# Altium PCB Final_PDC.PcbDoc (part 3 of 4)
Units mil, origin at the board's own origin, x right, y up, seen from the top; angles counter-clockwise.
Board outline 5200.04 x 5000 mil, 4 copper layers (Top Layer, Signal Layer 1, Signal Layer 2, Bottom Layer), stack 30.634 mil thick; 172 components, 174 nets, 838 pads, 925 vias.
Unrouted connection lines stored in the file: 134.
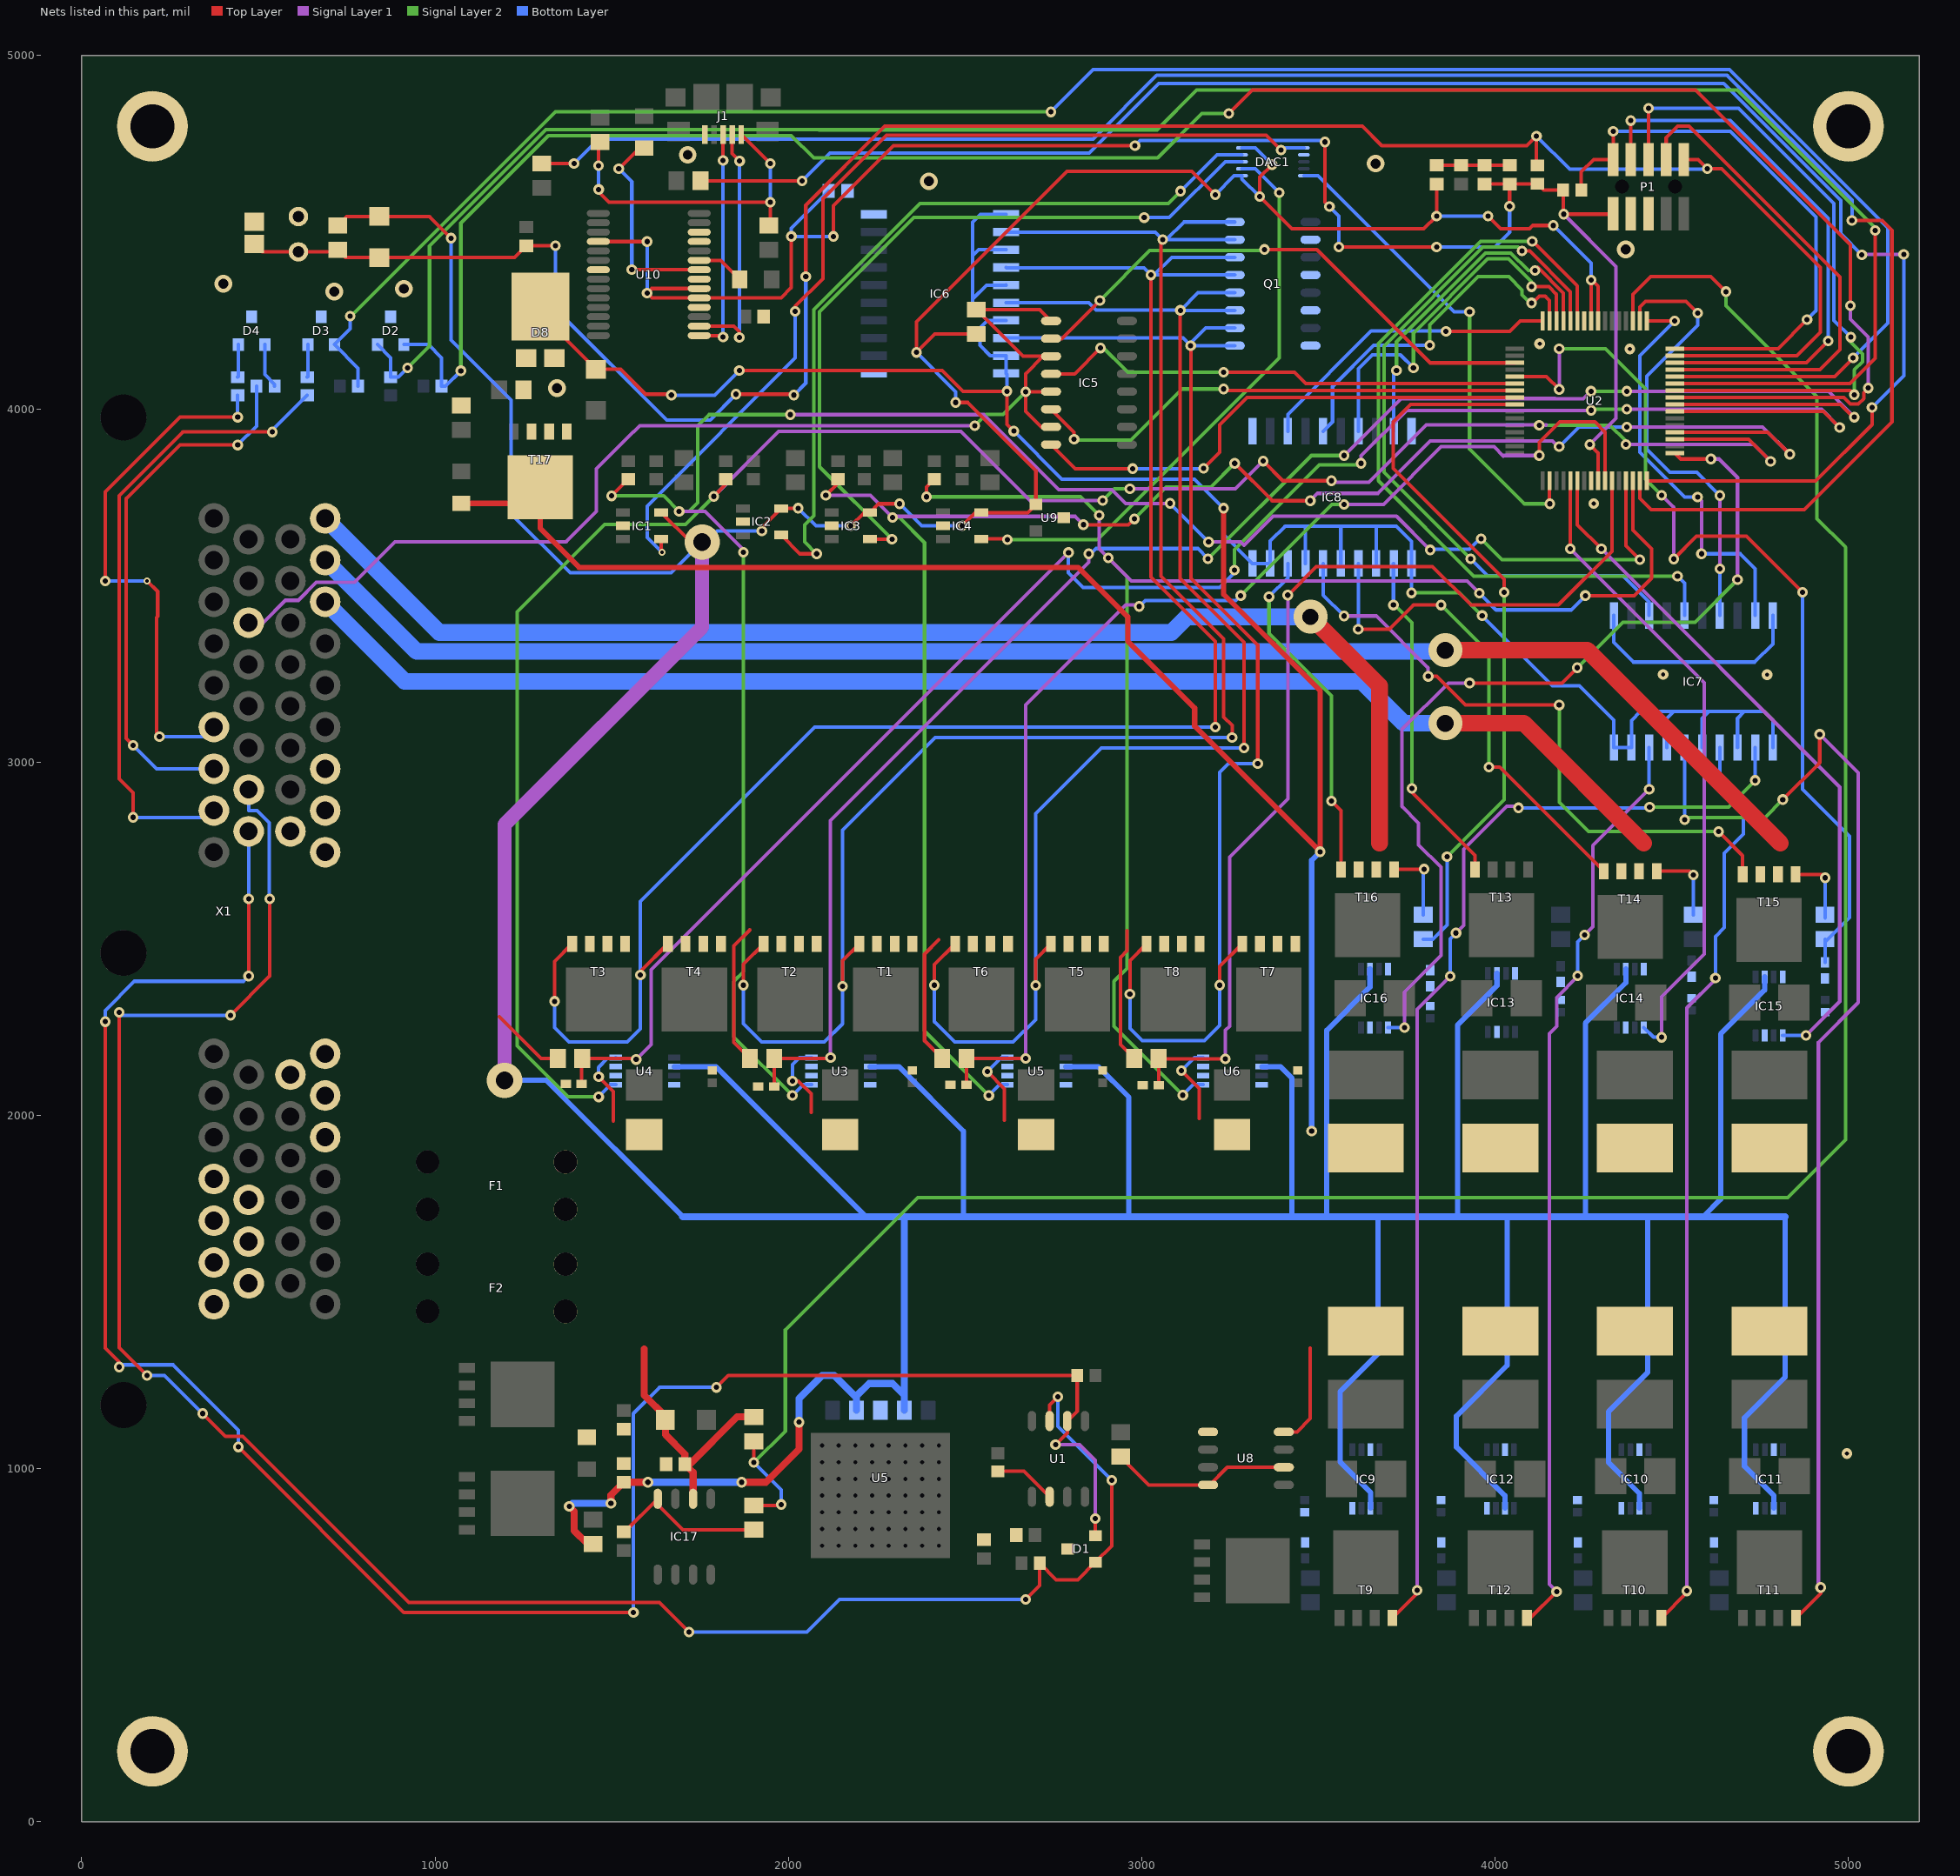
[diagram p4: the nets of this part, all layers, seen from the top]

## Via types
v1: diameter 24, hole 11, Top Layer to Bottom Layer, 480 vias
v2: diameter 30, hole 15, Top Layer to Bottom Layer, 416 vias
v3: diameter 50, hole 28, Top Layer to Bottom Layer, 9 vias
v4: diameter 30, hole 12, Top Layer to Bottom Layer, 6 vias
v5: diameter 96, hole 48, Top Layer to Bottom Layer, 6 vias
v6: diameter 100, hole 50, Top Layer to Bottom Layer, 4 vias
v7: diameter 20, hole 10, Top Layer to Bottom Layer, 2 vias
v8: diameter 96, hole 46, Top Layer to Bottom Layer, 1 vias
v9: diameter 40, hole 20, Top Layer to Bottom Layer, 1 vias

## Nets (pads, with @x,y where several pads share a name; then routed paths per layer and width w, separated by ;. In a path a pad name is that pad's centre, name@x,y a point inside that pad or via, vN(x,y) a via of type N, cw(c..) or ccw(c..) an arc to the next point about the centre after c; other vN are vias at no path point) (continued)
+5: C4.2 C19.2 D6.2 DAC1.1 DAC1.5 IC1.5 IC2.5 IC3.5 IC4.5 IC9.2 IC10.2 IC11.2 IC12.2 IC13.2 IC14.2 IC15.2 IC16.2 R16.2 R63.1 R65.2 U2.8 U2.9 U3.2 U4.2 U5.2 U5.4@2328.09,1164.95 U6.2 U9.1 | length 23352.1
  Top Layer w10: R65.2@724.37,4518.87 749.97,4544.46 D6.2@842.48,4544.46 984.3,4544.46 v2(1045.52,4483.24) ; IC1.5@1640.36,3706.47 1723.72,3623.1 v6(1755.74,3623.1) ; v2(1924.89,3654.59) 1924.89,3663.73 IC2.5@1979.25,3718.1 2027.16,3718.1 v2(2027.9,3718.84) ; v2(2176.77,3669.07) 2214.17,3706.47 IC3.5@2230.91,3706.47 2255.78,3731.34 v2(2314.57,3731.34) ; v2@2469.53,4018.06 v2(2473.57,4018.06) 2507.5,4018.06 2700.31,3825.25 U9.1@2700.31,3729.4 2677.38,3706.47 IC4.5@2545.87,3706.47 2529.13,3706.47 v2(2491.73,3669.07) ; R16.2@2532.01,4211.98 2414.37,4211.98 v2(2362.2,4159.81) 2362.2,4246.43 2788.51,4672.73 3141.4,4672.73 v2(3207.82,4606.3) ; v2(3368.8,4691.38) 3333.47,4656.04 v2(3333.47,4600.88) 3424.94,4509.41 3797.71,4509.41 v2(3834.26,4545.96) C4.2@3834.26,4636.53 ; v2(3979.76,4545.96) 4015.85,4509.86 4097.48,4509.86 4106.8,4519.18 v2(4164.97,4519.18) ; U2.9@4272.05,4248.99 v2(4272.05,4364.65) 4273.9,4364.65 4291.73,4346.82 U2.8@4291.73,4248.99
  Top Layer w20: v2(1379.63,893.21) 1393.64,879.2 1393.64,824.52 1431.36,786.8 R63.1@1446.99,786.8 ; v2(1497.74,901.96) 1497.74,925.34 C19.2@1534,961.61 v2(1602.33,961.61) ; v2(1867.8,961.61) 1936.27,961.61 2029.86,1055.2 v2(2029.86,1131.68)
  Signal Layer 1 w40: v6(1196.81,2099.3) 1196.81,2823.46 1755.74,3382.39 v6(1755.74,3623.1)
  Bottom Layer w10: v2(1045.52,4483.24) 1045.52,4194.53 1215.36,4024.69 1215.36,3702.64 1382.27,3535.73 1668.38,3535.73 v6(1755.74,3623.1) 1766.94,3623.1 1798.44,3654.59 v2(1924.89,3654.59) ; v2(2027.9,3718.84) 2077.67,3669.07 v2(2176.77,3669.07) ; 2192.65,1201.31 2192.65,1205.61 ; v2(2314.57,3731.34) 2376.85,3669.07 v2(2491.73,3669.07) ; v2(2362.2,4159.81) 2473.57,4048.45 v2(2473.57,4018.06) ; v2(3207.82,4606.3) 3261.54,4660.02 DAC1.1@3283.58,4660.02 3283.58,4650.76 v2(3333.47,4600.88) ; DAC1.5@3283.58,4738.76 3321.42,4738.76 v2(3368.8,4691.38) ; v2(3834.26,4545.96) v2(3979.76,4545.96) ; v2(4164.97,4519.18) 4272.05,4412.11 v2(4272.05,4364.65)
  Bottom Layer w15: v6(1196.81,2099.3) 1314.92,2099.3 1700.89,1713.32 ; U4.2@1677,2138.09 1794.76,2138.09 2219.52,1713.32 ; U3.2@2231.12,2138.09 2312.72,2138.09 2495.39,1955.43 2495.39,1713.32 ; U5.2@2785.25,2138.09 2876.82,2138.09 2963.14,2051.77 2963.14,1714.09 2962.38,1713.32 ; U6.2@3339.37,2138.09 3392.26,2138.09 3425.2,2105.15 3425.2,1713.32 ; 3523.53,1713.32 3523.53,2241.03 3645.85,2363.35 IC16.2@3645.85,2414.29 ; IC9.2@3647.23,887.88 3647.23,932.97 3561.6,1018.6 3561.6,1218.3 3668.96,1325.67 3668.96,1713.32 ; 3893.31,1713.32 3894.02,1714.03 3894.02,2256.17 4005.24,2367.39 IC13.2@4005.24,2402.09 ; IC12.2@4027.81,887.88 4027.81,923.85 3890.34,1061.32 3890.34,1148.59 4033.86,1292.1 4033.86,1713.32 ; 4255.27,1713.32 4255.27,2260.96 4369.67,2375.36 IC14.2@4369.67,2414.29 ; IC10.2@4408.39,887.88 4408.39,930.01 4320.59,1017.8 4320.59,1161.29 4431.25,1271.95 4431.25,1713.32 ; 4589.28,1713.32 4638.37,1762.42 4638.37,2230.61 4762.78,2355.02 IC15.2@4762.78,2392.24 ; IC11.2@4788.96,887.88 4788.96,923.52 4705.7,1006.79 4705.7,1144.03 4820.74,1259.07 4820.74,1713.32
  Bottom Layer w20: v2(1379.63,893.21) 1388.38,901.96 v2(1497.74,901.96) ; v2(1602.33,961.61) v2(1867.8,961.61) ; 1700.89,1713.32 2219.52,1713.32 2328.09,1713.32 ; v2(2029.86,1131.68) 2029.86,1198.69 2095.07,1263.9 2130.06,1263.9 2192.65,1201.31 U5.2@2192.65,1164.95 ; 2192.65,1205.61 2228.09,1241.05 2294.83,1241.05 2328.09,1207.79 ; U5.4@2328.09,1164.95 2328.09,1207.79 ; 4820.74,1713.32 4589.28,1713.32 4431.25,1713.32 4255.27,1713.32 4033.86,1713.32 3893.31,1713.32 3668.96,1713.32 3523.53,1713.32 3425.2,1713.32 2962.38,1713.32 2495.39,1713.32 2328.09,1713.32 ; 2328.09,1207.79 2328.09,1713.32
+12: "PTC Fuse1.2" "PTC Fuse2.2" "PTC Fuse3.2" "PTC Fuse4.2" "PTC Fuse5.2" "PTC Fuse6.2" "PTC Fuse7.2" "PTC Fuse8.2" C21.2 D5.1 D7.2 D8.3 F1.1 F2.1 IC6.11 IC6.13 IC6.15 IC6.17 IC6.19 IC6.20 IC7.11 IC7.13 IC7.15 IC7.17 IC7.19 IC7.20 IC8.11 IC8.13 IC8.15 IC8.17 IC8.19 IC8.20 IC17.2 LED2.1 R25.2 R28.2 R31.2 R34.2 R61.2 R64.1 T17.mb U3.8 U4.8 U5.8 U6.8 U8.4 U8.6 U8.8 | length 13545.8
  Top Layer w10: D8.3@1297.84,4289.53 1297.84,4269.49 D7.2@1455.32,4112.01 1525.11,4112.01 1595.62,4041.5 1666.34,4041.5 v2(1668.9,4038.94) ; v2(1463.06,2109.53) 1504.47,2068.12 1504.47,1984.55 ; v2(1861,4108.9) 2435.17,4108.9 2494.14,4049.92 v2(2618.44,4049.92) 2618.44,3956.36 v2(2637.8,3937.01) ; v2(2011.16,2096.99) 2028.09,2096.99 2064.13,2060.94 2064.13,2008.42 ; v2(2562.82,2123.85) 2611.63,2075.04 2611.63,1986.28 ; R64.1@2940.29,1033.89 3020.21,953.97 U8.4@3187.34,953.97 3191.99,953.97 3241.99,1003.97 U8.6@3401.91,1003.97 ; v2(3111.82,2126.86) 3162.1,2076.58 3162.1,1991.04 ; U8.8@3401.91,1103.97 3439.37,1103.97 3476.81,1141.41 3476.81,1341.63
  Top Layer w15: LED2.1@1074.41,3732.44 1252.56,3732.44 T17.mb@1297.84,3777.72 1297.84,3661.35 1407.9,3551.28 2820.24,3551.28 2960.27,3411.25 2960.27,3342.45 3149.61,3153.11 3149.61,3101.84 v2(3505.13,2746.32) 3505.13,3201.65 3231.52,3475.26 v2(3231.52,3718.84)
  Top Layer w20: 1592.28,1339.29 1591.88,1207.9 1651.72,1148.07 D5.1@1651.72,1138.18 1651.72,1096.19 1706.84,1041.07 C21.2@1706.84,1013.18 C21.2@1708.7,1011.32 ; IC17.2@1730.26,914.75 1730.26,989.75 C21.2@1708.7,1011.32 ; R61.2@1902.11,1146.45 1854.58,1146.45 1719.45,1011.32 C21.2@1708.7,1011.32
  Signal Layer 2 w10: v2(3763.2,3479.15) 3898.92,3479.15 v2(3963.29,3414.77)
  Bottom Layer w10: v2(1463.06,2109.53) 1463.06,2134.99 1462.09,2135.96 1487.49,2161.36 1508.89,2161.36 U4.8@1511.21,2163.68 ; v2(1668.9,4038.94) 1791.04,4038.94 v2(1861,4108.9) ; v2(2011.16,2096.99) 2011.16,2143.42 2031.43,2163.68 U3.8@2065.33,2163.68 ; v2(2562.82,2123.85) 2602.65,2163.68 U5.8@2619.46,2163.68 ; IC6.17@2615.95,4250.43 2562.74,4250.43 ; IC6.15@2615.95,4350.43 2615.49,4349.97 2560.45,4349.97 2522.81,4312.33 2521.1,4312.33 ; IC6.13@2615.95,4450.43 2537.98,4450.43 2521.1,4433.56 ; IC6.11@2615.95,4550.43 2543.69,4550.43 2521.1,4527.84 2521.1,4433.56 ; v2(2618.44,4049.92) 2618.44,4097.94 IC6.20@2615.95,4100.43 IC6.19@2615.95,4150.43 2571.11,4150.43 2541.7,4179.84 2541.7,4229.39 2562.74,4250.43 ; v2(2637.8,3937.01) 2773.85,3800.96 3149.4,3800.96 v2(3231.52,3718.84) 3231.52,3644.18 IC8.20@3313.2,3562.5 IC8.19@3363.2,3562.5 3363.2,3625.75 3405.74,3668.3 3463.2,3668.3 ; v2(3111.82,2126.86) 3148.64,2163.68 U6.8@3173.58,2163.68 ; IC8.17@3463.2,3562.5 3463.2,3668.3 ; IC8.15@3563.2,3562.5 3563.2,3668.3 ; IC8.13@3663.2,3562.5 3663.2,3667.47 3664.02,3668.3 ; v2(3763.2,3479.15) IC8.11@3763.2,3562.5 3763.2,3625.11 3720.01,3668.3 3664.02,3668.3 ; v2(3963.29,3414.77) 4161.99,3216.07 4238.7,3216.07 4335.93,3118.85 IC7.20@4335.93,3041.34 IC7.19@4385.93,3041.34 4385.93,3117.9 4411.23,3143.2 4505.22,3143.2 ; IC7.17@4485.93,3041.34 4485.93,3123.92 4505.22,3143.2 ; IC7.15@4585.93,3041.34 4585.93,3123.92 4605.22,3143.2 ; IC7.13@4685.93,3041.34 4685.93,3123.92 4705.22,3143.2 ; IC7.11@4785.93,3041.34 4785.93,3119.35 4762.09,3143.2 4705.22,3143.2 ; 2521.1,4312.33 2521.1,4433.56 ; 2521.1,4312.33 2521.1,4292.07 2562.74,4250.43 ; 3463.2,3668.3 3563.2,3668.3 ; 3563.2,3668.3 3664.02,3668.3 ; 4505.22,3143.2 4605.22,3143.2 ; 4605.22,3143.2 4705.22,3143.2
  Bottom Layer w15: v2(3480.89,1955.43) 3480.89,2722.08 v2(3505.13,2746.32)
BAT_SENSE: R61.1 R62.2 U2.3 | length 6842.8
  Top Layer w10: R62.2@1902.11,895.86 1977.13,895.86 v2(1979.86,898.59) ; v2(1902.11,1017.43) R61.1@1902.11,1077.55 ; U2.3@4390.16,4248.99 4390.16,4323.56 4440.67,4374.07 4610.61,4374.07 4652.82,4331.85 v2(4653.01,4331.85)
  Signal Layer 2 w10: v2(1902.11,1017.43) 1991.33,1106.65 1991.33,1392.68 2365.68,1767.03 4828.12,1767.03 4991.64,1930.54 4991.64,3608.22 4911.01,3688.86 4911.01,4034.2 4653.01,4292.19 v2(4653.01,4331.85)
  Bottom Layer w10: v2(1902.11,1017.43) 1979.86,939.68 v2(1979.86,898.59)
CAN_N: D1.2 R13.1 U1.6 X1.A25 | length 6085.9
  Top Layer w10: v2(66.89,2265.37) 66.89,1340.86 106.26,1301.49 v2(106.26,1287.73) ; v2(443.39,1061.52) 911.68,593.23 v2(1561.56,593.23) ; v2(472.44,2394.49) v2(472.44,2613.19) ; v2(1796.24,1230.12) 1829.99,1263.86 R13.1@2817.34,1263.86 2817.34,1163.08 U1.6@2789.19,1134.93 2789.19,1101.62 v2(2755.91,1068.34) ; D1.2@2868.52,810.13 v2(2868.52,859.11)
  Signal Layer 1 w10: v2(2755.91,1068.34) 2824.04,1068.34 2868.52,1023.85 v2(2868.52,859.11)
  Bottom Layer w10: v2(66.89,2265.37) 66.89,2296.95 149.68,2379.73 457.69,2379.73 v2(472.44,2394.49) ; v2(106.26,1287.73) 112.43,1293.9 258.26,1293.9 443.39,1108.77 v2(443.39,1061.52) ; v2(472.44,2613.19) X1.A25@472.44,2804.18 ; v2(1561.56,593.23) 1561.56,1156.07 1635.6,1230.12 v2(1796.24,1230.12)
CAN_P: D1.1 R14.2 U1.7 X1.A24 | length 5873.4
  Top Layer w10: v2(106.26,2292.03) 106.26,1342.64 v2(185,1263.9) ; v2(342.48,1156.01) 406.97,1091.52 455.82,1091.52 473.39,1073.95 473.39,1073.74 925.77,621.36 1634.95,621.36 v2(1718.61,537.7) ; v2(421.22,2283.46) 532.25,2394.49 v2(532.25,2613.19) ; v2(2671.36,629.92) 2711.04,669.6 R14.2@2711.04,732.7 2758.01,685.73 2818.93,685.73 D1.1@2868.52,735.32 2914.88,781.68 v2(2914.88,967.04) ; U1.7@2739.19,1134.93 2739.19,1180.25 v2(2762.2,1203.26)
  Bottom Layer w10: v2(106.26,2292.03) 114.83,2283.46 v2(421.22,2283.46) ; v2(185,1263.9) 234.6,1263.9 v2(342.48,1156.01) ; X1.A24@472.44,2922.29 472.44,2862.49 496.59,2862.49 530.75,2828.33 530.75,2614.69 v2(532.25,2613.19) ; v2(1718.61,537.7) 2052.23,537.7 2144.45,629.92 v2(2671.36,629.92) ; v2(2762.2,1203.26) 2762.2,1119.72 v2(2914.88,967.04)
CS: DAC1.10 U2.34 | length 1372.9
  Top Layer w10: U2.34@4153.94,3796.23 4153.94,3731.86 v2(4154.45,3731.34)
  Signal Layer 2 w10: v2(3927.57,4274.73) 3927.57,3886.44 4082.66,3731.34 v2(4154.45,3731.34)
  Bottom Layer w10: DAC1.10@3458.78,4660.02 3499.12,4660.02 3884.41,4274.73 v2(3927.57,4274.73)
D_IN_1: R18.2 X1.A33 | length 1840.6
  Top Layer w10: v2(145.63,2843.67) 145.63,2913.39 106.26,2952.76 106.26,3754.32 286.47,3934.53 v2(539.33,3934.53)
  Bottom Layer w10: v2(145.63,2843.67) 376.97,2843.67 385.28,2851.98 X1.A33@374.02,2863.24 ; v2(539.33,3934.53) 536.85,3937.01 R18.2@638.27,4038.43
D_IN_2: R20.2 X1.A32 | length 1528.7
  Top Layer w10: v2(145.63,3047.52) 126.26,3066.89 126.26,3746.04 277.87,3897.64 v2(441.42,3897.64)
  Bottom Layer w10: v2(145.63,3047.52) 211.81,2981.35 X1.A32@374.02,2981.35 ; v2(441.42,3897.64) 494.57,3950.79 R20.2@494.57,4064.02
D_IN_3: R17.2 X1.A31 | length 1517.5
  Top Layer w10: v2(66.89,3512.84) 66.89,3765.41 277.87,3976.38 v2(441.42,3976.38) ; v7(185,3512.84) 215,3482.84 215,3412.77 211.81,3409.57 211.81,3080.58 v2(220,3072.39)
  Bottom Layer w10: v2(66.89,3512.84) v7(185,3512.84) ; v2(220,3072.39) 346.95,3072.39 X1.A31@374.02,3099.46 ; v2(441.42,3976.38) R17.2@441.42,4038.43
D_N: J1.2 U10.16 | length 721.4
  Top Layer w10: U10.16@1747.53,4234.11 1845.6,4234.11 1861.89,4217.81 1861,4216.91 v2(1861,4201.81) ; J1.2@1840.69,4776.58 1840.69,4722.73 v2(1861.89,4701.53)
  Bottom Layer w10: v2(1861,4201.81) 1861,4700.63 v2(1861.89,4701.53)
D_OUT_1: D2.1 R22.1 U2.57 | length 6026.8
  Top Layer w10: v2(3246.18,4836.06) 3312.68,4902.56 4567.05,4902.56 5005.25,4464.36 v2(5005.25,4291.97) ; U2.57@4508.27,4032.45 4986.96,4032.45 5005.81,4013.6 5027.77,4013.6 5043.29,4029.12 5043.29,4046 v2(5056.14,4058.85)
  Signal Layer 1 w10: v2(5005.25,4291.97) 5005.25,4254.22 5056.14,4203.32 v2(5056.14,4058.85)
  Signal Layer 2 w10: v2(1072.98,4107.84) 1072.98,4526.32 1320.44,4773.78 2008.33,4773.78 2071.5,4710.61 3045.04,4710.61 3170.48,4836.06 v2(3246.18,4836.06)
  Bottom Layer w10: D2.1@911.89,4182.13 980.79,4182.13 1018.19,4144.73 R22.1@1018.19,4064.02 1029.16,4064.02 v2(1072.98,4107.84)
D_OUT_2: D2.2 R19.1 U2.59 | length 5939.8
  Top Layer w10: U2.59@4508.27,4071.82 5004.02,4071.82 5075.46,4143.27 v2(5075.46,4505)
  Signal Layer 2 w10: v2(922.41,4115.68) 984.3,4177.57 984.3,4460.97 1313.61,4790.28 2085.74,4790.28 2086.09,4789.93 3043.09,4789.93 3155.72,4902.56 4685.69,4902.56 5075.46,4512.79 v2(5075.46,4505)
  Bottom Layer w10: D2.2@837.09,4182.13 874.49,4144.73 R19.1@874.49,4089.61 896.34,4089.61 v2(922.41,4115.68)
D_OUT_3: D3.1 R21.1 U2.60 | length 6007.8
  Top Layer w10: U2.60@4508.27,4091.51 4961.45,4091.51 5013.18,4143.24 v2(5013.18,4144.33)
  Signal Layer 2 w10: v2(759.63,4262.7) 762.69,4262.7 1340.54,4840.55 v2(2742.57,4840.55)
  Bottom Layer w10: v2(759.63,4262.7) 759.63,4226.72 D3.1@715.04,4182.13 781.97,4115.2 R21.1@781.97,4064.02 ; v2(2742.57,4840.55) 2862.64,4960.63 4663.15,4960.63 5111.71,4512.07 5111.71,4242.86 v2(5013.18,4144.33)
D_OUT_4: D3.2 R18.1 | length 93.3
  Bottom Layer w10: R18.1@638.27,4089.61 640.24,4091.58 D3.2@640.24,4182.13
D_OUT_5: D4.1 R20.1 | length 129.5
  Bottom Layer w10: D4.1@518.19,4182.13 518.19,4097.04 545.75,4069.49 R20.1@545.75,4064.02
D_OUT_6: D4.2 R17.1 | length 93.3
  Bottom Layer w10: R17.1@441.42,4089.61 443.39,4091.58 D4.2@443.39,4182.13
D_P: J1.3 U10.15 | length 642.8
  Top Layer w10: U10.15@1747.53,4207.49 1810.73,4207.49 v2(1815.1,4203.12) ; v2(1815.1,4703.32) J1.3@1815.1,4776.58
  Bottom Layer w10: v2(1815.1,4203.12) v2(1815.1,4703.32)
DGND: C1.1 C2.1 C3.1 C4.1 C5.1 C6.1 C7.1 C8.1 C9.1 C10.1 C11.1 C12.1 C13.1 C14.1 C15.1 C16.1 C17.1 C18.1 C19.1 C20.1 C21.1 C22.1 C23.1 C25.1 C26.1 D1.3 D2.3 D3.3 D4.3 D8.1 D8.2 DAC1.7 IC1.2 IC2.2 IC3.2 IC4.2 IC6.1 IC6.10 IC7.1 IC7.10 IC8.1 IC8.10 IC9.4 IC9.7 IC10.4 IC10.7 IC11.4 IC11.7 IC12.4 IC12.7 IC13.4 IC13.7 IC14.4 IC14.7 IC15.4 IC15.7 IC16.4 IC16.7 IC17.4 J1.5 LED1.2 P1.3 P1.5 pad.2 pad.3 pad.4 pad.5 Q1.10 Q1.12 Q1.14 Q1.16 R15.1 R27.1 R30.1 R33.1 R36.1 R39.1 R42.1 R45.1 R48.1 R51.1 R54.1 R57.1 R60.1 R62.1 R66.1 R67.1 T17.1 T17.2 T17.3 U1.2 U2.10 U2.40 U3.4 U3.6 U3.7 U4.4 U4.6 U4.7 U5.3@2260.37,1164.95 U5.4@2785.25,2086.91 U5.6@2619.46,2112.5 U5.7 U6.4 U6.6 U6.7 U8.1 U9.3 U10.7 U10.18 U10.21 U10.25 U10.26 W1.1 X1.B17 X1.B18 X1.B19 X1.B23 X1.B24 X1.B25 X1.B26 | length 1488.8
  Top Layer w10: T17.3@1268,3925.04 T17.3@1268,3926.57 ; C22.1@1534,821.25 1536.76,821.25 IC17.4@1630.26,914.75 1630.26,898.59 1701.89,826.96 R62.1@1902.11,826.96 ; R15.1@2592.93,992.21 2593.46,992.74 2666.81,992.74 U1.2@2739.19,920.36 ; C4.1@3834.26,4689.68 C6.1@3903.16,4689.68 C3.1@3970.44,4689.68 C5.1@4040.95,4689.68
  Bottom Layer w10: IC7.1@4335.93,3415.36 4335.93,3338.95 4391.59,3283.29 4734.5,3283.29 4785.93,3334.72 IC7.10@4785.93,3415.36
  other v3: 1345.08,4058.85 715.04,4332.27 911.89,4339.93 400.9,4354.16 4369.67,4451.27 2397.25,4644.27 3661.42,4694.35 1715.04,4719.07
  other v4: 4995.52,1042.83 4475.44,3248.03 4769.67,3247.66 4278.79,3731.86 4380.9,4169.66 4126.01,4184.28
DVCC: C3.2 C5.2 C25.2 P1.1 R23.2 R24.2 U2.41 U10.4 U10.19 U10.20 | length 5102.6
  Top Layer w10: U10.4@1462.09,4473.64 v2(1600.08,4473.64) ; U10.20@1747.53,4340.56 1612.97,4340.56 v2(1600.08,4327.68) 1613.81,4313.95 U10.19@1747.53,4313.95 1979.16,4313.95 2008.33,4343.13 v2(2008.33,4488.19) ; v2(2127.56,4488.19) 2127.56,4575 2297.56,4745 v2(2980.8,4745) ; v2(3518.51,4755.48) 3518.51,4585.4 v2(3531.06,4572.86) ; v2(3557.88,4457.8) v2(3834.27,4457.8) ; C3.2@3970.44,4636.53 C5.2@4040.95,4636.53 ; v2@4040.95,4572.86 v2(4040.95,4573.2) C5.2@4040.95,4636.53 ; v2(4268.12,3898.88) 4291.73,3875.27 U2.41@4291.73,3796.23 ; P1.1@4333.98,4552.14 4332.97,4551.13 v2(4194.1,4551.13) 4192.53,4552.7 R23.2@4192.53,4619.58 4137.63,4619.58 R24.2@4119.7,4637.51 4118.71,4636.53 C5.2@4040.95,4636.53
  Signal Layer 1 w10: v2(4194.1,4551.13) 4341.9,4403.33 4341.9,3972.67 v2(4268.12,3898.88)
  Bottom Layer w10: v2(1600.08,4327.68) v2(1600.08,4473.64) ; C25.2@2113.79,4616.71 2008.33,4511.26 v2(2008.33,4488.19) v2(2127.56,4488.19) ; v2(2980.8,4745) 2995.31,4759.51 3514.49,4759.51 v2(3518.51,4755.48) ; v2(3531.06,4572.86) 3557.88,4546.03 v2(3557.88,4457.8) ; v2(3834.27,4457.8) 3999.25,4457.8 4040.95,4499.51 v2(4040.95,4573.2)
DVCC_5V: J1.1 R70.2 R71.2 | length 934
  Top Layer w10: v2(1462.58,4688.69) 1462.58,4751.05 R71.2@1467.01,4755.48 ; v2(1463.06,4621.07) 1463.06,4614.34 1492.43,4584.97 v2(1948.51,4584.97) 1948.51,4523.01 R70.2@1944.57,4519.07 ; J1.1@1866.28,4776.58 v2(1948.51,4694.35)
  Bottom Layer w10: v2(1462.58,4688.69) 1462.58,4621.55 v2(1463.06,4621.07) ; v2(1948.51,4584.97) v2(1948.51,4694.35)
EMERGENCY_SHUTDOWN: IC5.9 IC5.11 IC5.13 IC5.15 R16.1 X1.A20 | length 3370.4
  Top Layer w10: IC5.15@2743.37,3948.88 2715.66,3948.88 2671.36,3993.18 v2(2671.36,4048.45) ; IC5.13@2743.37,4048.88 2742.93,4048.45 v2(2671.36,4048.45) ; IC5.11@2743.37,4148.88 IC5.11@2720.96,4148.88 ; IC5.9@2743.37,4248.88 2711.37,4280.88 R16.1@2532.01,4280.88 2664,4148.88 IC5.11@2720.96,4148.88 ; v2(2671.36,4048.45) 2671.36,4099.29 IC5.11@2720.96,4148.88
  Signal Layer 1 w10: X1.A20@472.44,3394.73 513.04,3394.73 576.35,3458.04 613.25,3458.04 663.81,3508.59 771.43,3508.59 886.68,3623.85 1370.83,3623.85 1456.58,3709.61 1456.58,3830.26 1561.58,3935.26 1562.31,3934.53 1580.04,3952.25 v2(2527.28,3952.25)
  Signal Layer 2 w10: v2(2527.28,3952.25) 2559.05,3984.03 2606.95,3984.03 v2(2671.36,4048.45)
FTDI_GREEN: D9.2 U10.23 | length 136.7
  Top Layer w10: U10.23@1747.53,4420.41 1808,4420.41 D9.2@1861.89,4366.51
FTDI_RED: D10.2 U10.22 | length 588
  Top Layer w10: v2(1519.88,4679.7) 1578.36,4738.19 D10.2@1591.8,4738.19 ; v2(1556.8,4393.87) 1556.88,4393.79 U10.22@1747.53,4393.79
  Bottom Layer w10: v2(1519.88,4679.7) 1556.8,4642.78 v2(1556.8,4393.87)
FTDI_RX: R69.2 U2.47 | length 5560.6
  Top Layer w10: R69.2@1301.77,4694.47 v2(1393.26,4694.47) ; U2.47@4409.84,3796.23 4409.84,3746.37 4441.11,3715.1 4874.9,3715.1 5122.94,3963.15 5122.94,4505.39 5094.71,4533.62 v2(5009.78,4533.62)
  Bottom Layer w10: v2(1393.26,4694.47) 1462.58,4763.78 2862.17,4763.78 3042.52,4944.13 4656.31,4944.13 5009.78,4590.66 v2(5009.78,4533.62)
FTDI_TX: R68.2 U2.48 | length 5002.7
  Top Layer w10: R68.2@1751.74,4660.02 1766.09,4645.67 v2(2038.98,4645.67) ; U2.48@4429.53,3796.23 4907.37,3796.23 5066.46,3955.33 v2(5066.46,4003.84)
  Signal Layer 1 w10: v2(5037.86,4435.99) 5038.78,4436.91 v2(5156.31,4436.91)
  Bottom Layer w10: v2(2038.98,4645.67) 2117.72,4724.41 2851.08,4724.41 3047.93,4921.26 4646.59,4921.26 4977.88,4589.97 4977.88,4495.96 v2(5037.86,4435.99) ; v2(5066.46,4003.84) 5156.31,4093.69 v2(5156.31,4436.91)
HC1_ANALOG_BACKUP_REF: DAC1.2 IC4.4 | length 1658.6
  Top Layer w10: IC4.4@2545.87,3631.66 2617.43,3631.66 v2(2619.46,3629.64)
  Signal Layer 2 w10: v2(2619.46,3629.64) 2874.89,3629.64 3389.02,4143.76 v2(3389.02,4611.91)
  Bottom Layer w10: DAC1.2@3283.58,4679.7 3321.23,4679.7 v2(3389.02,4611.91)
HC1_EN: IC5.16 U2.24 | length 1469.4
  Top Layer w10: IC5.16@2743.37,3898.88 2811.46,3830.79 v2(2974.06,3830.79) ; v2(3175.16,3831.9) 3220.3,3877.04 3220.3,3954.82 3297.94,4032.45 U2.24@4055.51,4032.45
  Bottom Layer w10: v2(2974.06,3830.79) 3174.04,3830.79 v2(3175.16,3831.9)
HC1_GATE: IC6.18 Q1.1 Q1.2 T7.4 T8.4 | length 3576.4
  Top Layer w10: v2(2966.34,2343.09) 2966.34,2438.4 T8.4@3013.47,2485.53 ; v2(3138.42,4178.91) 3139.69,4177.64 3139.69,3520.08 3328.09,3331.68 v2(3328.09,2995.64) ; v2(3220.57,2368.7) 3220.57,2421.73 T7.4@3284.37,2485.53
  Bottom Layer w10: IC6.18@2615.95,4200.43 3116.9,4200.43 v2(3138.42,4178.91) 3138.42,4186.67 3180.66,4228.91 Q1.2@3262.91,4228.91 ; v2(2966.34,2343.09) 2966.34,2245.98 3000.85,2211.47 3177.44,2211.47 3220.57,2254.6 v2(3220.57,2368.7) 3220.57,2970.94 3245.28,2995.64 v2(3328.09,2995.64) ; v2@3152.32,4178.91 Q1.1@3262.91,4178.91
HC1_ISENSE_ADC: R12.1 U2.46 U6.5 | length 4342.3
  Top Layer w10: v2(2390.53,3751.05) 2390.53,3778.49 R12.1@2413,3800.96 ; v2(4255.27,3471.41) 4393.64,3471.41 4443.02,3520.79 4443.02,3604.09 4390.16,3656.95 U2.46@4390.16,3796.23
  Signal Layer 1 w10: v2(2879.68,3698.29) 2879.68,3603.57 v2(2905.19,3578.06) 2970.41,3512.84 3920.8,3512.84 v2(3955.24,3478.4)
  Signal Layer 2 w10: v2(2390.53,3751.05) 2826.91,3751.05 v2(2879.68,3698.29) ; v2(2905.19,3578.06) 2957.94,3525.32 2957.94,2416.04 2921.57,2379.68 2921.57,2251.94 v2(3116.27,2057.24)
  Bottom Layer w10: v2(3116.27,2057.24) 3145.94,2086.91 U6.5@3173.58,2086.91 ; v2(3955.24,3478.4) 4002.74,3430.9 4214.76,3430.9 v2(4255.27,3471.41)
HC1_VSENSE_ADC: R35.1 R36.2 U2.43 | length 2911.3
  Top Layer w10: R36.2@3047.92,2085.3 R35.1@3047.92,2161.25 3049.44,2162.78 3052.45,2159.77 v2(3236.79,2159.77) ; v2(3413.2,3472.75) 3493.7,3553.25 3822.82,3553.25 3931.42,3444.65 4178.75,3444.65 4331.1,3597.01 U2.43@4331.1,3796.23
  Signal Layer 1 w10: v2(3236.79,2159.77) 3236.79,2240.76 3248.53,2252.5 3248.53,2731.36 3413.2,2896.03 v2(3413.2,3472.75)
HC2_ANALOG_BACKUP_REF: DAC1.3 IC3.4 | length 2162.3
  Top Layer w10: IC3.4@2230.91,3631.66 2231.62,3630.95 v2(2293.08,3630.95)
  Signal Layer 2 w10: v2(2293.08,3630.95) 2088.09,3835.94 2088.09,4274.33 2355.16,4541.41 v2(3006.87,4541.41)
  Bottom Layer w10: v2(3006.87,4541.41) 3077.94,4541.41 3235.91,4699.39 DAC1.3@3283.58,4699.39
HC2_EN: IC5.14 U2.23 | length 1423
  Top Layer w10: IC5.14@2743.37,3998.88 2808.51,3933.74 v2(2808.51,3914.27) ; v2(3231.52,4056.21) 3235.59,4052.14 U2.23@4055.51,4052.14
  Signal Layer 2 w10: v2(2808.51,3914.27) 2808.51,3911.47 2969.12,3911.47 3113.86,4056.21 v2(3231.52,4056.21)
HC2_GATE: IC6.16 Q1.3 Q1.4 T5.4 T6.4 | length 4112
  Top Layer w10: v2(2412.69,2368.7) 2412.69,2426.56 T6.4@2471.66,2485.53 ; v2(2699.46,2367.62) 2699.46,2442.42 T5.4@2742.57,2485.53 ; v2(3109.24,4278.91) 3108.42,4278.09 3108.42,3519.95 3289.37,3339 v2(3289.37,3040.4)
  Bottom Layer w10: v2(2412.69,2368.7) 2412.69,2265.25 2470.47,2207.47 2635.88,2207.47 2699.46,2271.05 v2(2699.46,2367.62) 2699.46,2854.65 2885.21,3040.4 v2(3289.37,3040.4) ; IC6.16@2615.95,4300.43 2850.01,4300.43 2870.37,4280.08 3108.07,4280.08 v2(3109.24,4278.91) ; Q1.3@3262.91,4278.91 v2(3109.24,4278.91) ; Q1.4@3262.91,4328.91 3159.24,4328.91 v2(3109.24,4278.91)
HC2_ISENSE_ADC: R9.1 U2.52 U5.5@2619.46,2086.91 | length 5250.2
  Top Layer w10: v2(2105.79,3755.63) 2140.36,3790.2 R9.1@2140.36,3800.96 ; v2(2834.65,3672.31) 2835.17,3671.79 2962.43,3671.79 v2(2979.02,3688.38) ; v2(3262.91,3845.82) 3368.8,3739.93 v2(3476.96,3739.93) ; U2.52@4508.27,3934.03 4771.44,3934.03 v2(4833.84,3871.63)
  Signal Layer 1 w10: v2(2105.79,3755.63) 2231.5,3755.63 v2(2294.88,3692.24) 2298.2,3695.57 2811.39,3695.57 v2(2834.65,3672.31) ; v2(3476.96,3739.93) 3497.92,3760.89 3668.16,3760.89 3816.69,3909.42 4161.96,3909.42 4178.5,3892.89 v2(4181.33,3892.89) ; v2(4372.75,3948.88) 4756.59,3948.88 v2(4833.84,3871.63)
  Signal Layer 2 w10: v2(2294.88,3692.24) 2314.6,3692.24 2385.21,3621.63 2385.21,2238.21 v2(2567.27,2056.15) ; v2(2979.02,3688.38) 3069.13,3778.49 3195.59,3778.49 v2(3262.91,3845.82)
  Bottom Layer w10: v2(2567.27,2056.15) 2598.03,2086.91 U5.5@2619.46,2086.91 ; v2(4181.33,3892.89) 4237.32,3948.88 v2(4372.75,3948.88)
HC2_VSENSE_ADC: R32.1 R33.2 U2.42 | length 3421.1
  Top Layer w10: R33.2@2503.96,2086.61 R32.1@2503.96,2161.25 2671.19,2161.25 v2(2671.36,2161.08) ; v2(4124.82,3867.89) 4124.82,3905.58 4182.76,3963.53 4282.23,3963.53 4311.42,3934.34 U2.42@4311.42,3796.23
  Signal Layer 1 w10: v2(2671.36,2161.08) 2671.36,3162 2954.01,3444.65 2996.32,3444.65 v2(2992.37,3440.7) ; v2(3572.2,3729.4) 3684.02,3729.4 3847.54,3892.92 3996.77,3892.92 4023.27,3866.42 4024.74,3867.89 v2(4124.82,3867.89)
  Signal Layer 2 w10: v2(3279.96,3471.41) 3538.37,3729.82 3572.2,3729.82 v2(3572.2,3729.4)
  Bottom Layer w10: v2(2992.37,3440.7) 3009.44,3457.77 3266.31,3457.77 v2(3279.96,3471.41)
HC3_ANALOG_BACKUP_REF: DAC1.4 IC2.4 | length 2232.4
  Top Layer w10: IC2.4@1979.25,3643.3 2032.85,3589.7 v2(2079.86,3589.7)
  Signal Layer 2 w10: v2(2079.86,3589.7) 2045.87,3623.69 2045.87,3671.3 2071.59,3697.02 2071.59,4281.17 2371.76,4581.34 3074.84,4581.34 v2(3109.75,4616.25)
  Bottom Layer w10: v2(3109.75,4616.25) 3212.57,4719.07 DAC1.4@3283.58,4719.07
HC3_EN: IC5.12 U2.22 | length 1396
  Top Layer w10: IC5.12@2743.37,4098.88 2809.98,4098.88 v2(2883.3,4172.2) ; v2(3231.52,4103.64) 3432.18,4103.64 3464,4071.82 U2.22@4055.51,4071.82
  Signal Layer 2 w10: v2(2883.3,4172.2) 2883.3,4180.61 2960.27,4103.64 v2(3231.52,4103.64)
HC3_GATE: IC6.14 Q1.5 Q1.6 T3.4 T4.4 | length 5104.5
  Top Layer w10: v2(1338.08,2322.83) 1338.08,2435.56 T3.4@1388.06,2485.53 ; v2(1581.17,2397.89) 1581.17,2407.74 T4.4@1658.96,2485.53 ; v2(3026.09,4378.91) 3026.09,3523.6 3207.82,3341.87 v2(3207.82,3099.46)
  Bottom Layer w10: v2(1338.08,2322.83) 1338.08,2248.81 1379.36,2207.54 1544.04,2207.54 1581.17,2244.66 v2(1581.17,2397.89) 1581.17,2605.86 2074.77,3099.46 v2(3207.82,3099.46) ; IC6.14@2615.95,4400.43 2617.67,4398.72 3006.29,4398.72 v2(3026.09,4378.91) v2@3034.93,4378.91 ; Q1.5@3262.91,4378.91 v2@3034.93,4378.91 ; Q1.6@3262.91,4428.91 3084.93,4428.91 v2@3034.93,4378.91
HC3_ISENSE_ADC: R6.1 U2.51 U4.5 | length 6006.8
  Top Layer w10: v2(1788.67,3752.24) 1822.44,3786.02 R6.1@1822.44,3800.96 ; v2(3343.78,3852.14) 3399.4,3796.53 v2(3536.7,3796.53) ; U2.51@4508.27,3914.34 4716.9,3914.34 v2(4779.56,3851.69)
  Signal Layer 1 w10: v2(1788.67,3752.24) 1972.18,3935.75 2488.06,3935.75 2683.66,3740.16 v2(2889.22,3740.16) ; v2(2966.34,3773.4) 3265.04,3773.4 v2(3343.78,3852.14) ; v2(3536.7,3796.53) 3540.82,3792.4 3642.21,3792.4 3804.62,3954.82 4144.69,3954.82 4143.59,3953.71 v2(4124.82,3953.71) ; v2(4370.08,3899.11) 4732.13,3899.11 v2(4779.56,3851.69)
  Signal Layer 2 w10: v2(1463.06,2052.46) 1376.94,2052.46 1232.92,2196.48 1232.92,3425.76 1479.47,3672.31 1708.74,3672.31 v2(1788.67,3752.24) ; v2(2889.22,3740.16) 2922.46,3773.4 v2(2966.34,3773.4) ; v2(4124.82,3953.71) 4324.96,3953.71 4370.08,3908.59 v2(4370.08,3899.11)
  Bottom Layer w10: v2(1463.06,2052.46) 1497.51,2086.91 U4.5@1511.21,2086.91
HC3_VSENSE_ADC: R29.1 R30.2 U2.55 | length 5191.8
  Top Layer w10: R30.2@1415,2089.62 1415,2160.19 R29.1@1416.06,2161.25 1566.1,2161.25 v2(1569.1,2158.24) ; U2.55@4508.27,3993.08 4929.4,3993.08 v2(4975.08,3947.4)
  Signal Layer 1 w10: v2(1569.1,2158.24) 1611.88,2201.02 1611.88,2412.62 2661.22,3461.96 v2(2792.57,3593.31) ; v2(3620.26,3845.82) 3620.26,3866.96 3749.17,3995.87 v2(4272.05,3995.87) ; v2(4372.75,3998.88) 4923.6,3998.88 v2(4975.08,3947.4)
  Signal Layer 2 w10: v2(3262.27,3543.31) 3262.27,3601.14 3502.52,3841.39 3615.83,3841.39 v2(3620.26,3845.82) ; v2(4272.05,3995.87) 4275.06,3998.88 v2(4372.75,3998.88)
  Bottom Layer w10: v2(2792.57,3593.31) 2792.57,3536.07 2834.21,3494.42 3220.8,3494.42 3262.27,3535.89 v2(3262.27,3543.31)
HC4_ANALOG_BACKUP_REF: DAC1.6 IC1.4 | length 2722.8
  Top Layer w10: IC1.4@1640.36,3631.66 1640.36,3591.67 v7(1642.46,3593.77) ; v2(2019.14,4276.09) 2019.14,4290.23 2097.7,4368.78 2097.7,4594.7 2277.45,4774.46 3352.23,4774.46 v2(3393.68,4733.01)
  Bottom Layer w10: v7(1642.46,3593.77) 1600.08,3636.15 1600.08,3724.9 2019.14,4143.96 v2(2019.14,4276.09) ; v2(3393.68,4733.01) 3399.66,4738.99 DAC1.6@3458.78,4738.99
HC4_EN: IC5.10 U2.19 | length 1549
  Top Layer w10: IC5.10@2743.37,4198.88 2773.65,4198.88 v2(2881.34,4306.58) ; v2(3347.09,4451.27) 3495.55,4451.27 3816.69,4130.14 U2.19@4054.77,4130.14
  Signal Layer 2 w10: v2(2881.34,4306.58) 3022.73,4447.97 3343.78,4447.97 v2(3347.09,4451.27)
HC4_GATE: IC6.12 Q1.7 Q1.8 T1.4 T2.4 | length 4837.6
  Top Layer w10: v2(1872.46,2368.7) 1872.46,2428.13 T2.4@1929.86,2485.53 ; v2(2153.51,2365.45) 2153.51,2438.28 T1.4@2200.76,2485.53 ; v2(3059.51,4478.91) 3053.92,4473.32 3053.92,3526.32 3231.52,3348.72 3231.52,3127.97 3255.63,3103.86 v2(3255.63,3069.46)
  Bottom Layer w10: v2(1872.46,2368.7) 1872.46,2259.61 1924.53,2207.54 2101.98,2207.54 2153.51,2259.06 v2(2153.51,2365.45) 2153.51,2807.35 2415.62,3069.46 v2(3255.63,3069.46) ; IC6.12@2615.95,4500.43 3037.99,4500.43 v2(3059.51,4478.91) v2@3069.54,4478.91 ; Q1.7@3262.91,4478.91 v2@3069.54,4478.91 ; Q1.8@3262.91,4528.91 3119.54,4528.91 v2@3069.54,4478.91
HC4_ISENSE_ADC: R3.1 U2.45 U3.5 | length 5662.4
  Top Layer w10: v2(1499.55,3753.66) R3.1@1546.85,3800.96 ; U2.45@4370.47,3796.23 4370.47,3612.54 v2(4409.74,3573.27)
  Signal Layer 1 w10: v2(1690.75,3709.61) 1763.82,3709.61 1872.46,3600.96 v2(1872.46,3593.77) ; v2(2005.13,3983.6) 2552.87,3983.6 2765.07,3771.4 2915.05,3771.4 2954.01,3732.44 v2(3080.42,3732.44) ; v2(3188.98,3623.1) 3279.96,3623.1 3289.37,3613.68 3371.62,3695.93 3720.82,3695.93 v2(3816.13,3600.62)
  Signal Layer 2 w10: v2(1499.55,3753.66) 1646.69,3753.66 v2(1690.75,3709.61) 1718.71,3709.61 1743.54,3734.44 1743.54,3952.25 1774.88,3983.6 v2(2005.13,3983.6) ; v2(1872.46,3593.77) 1872.46,2406.18 1845.96,2379.68 1845.96,2221.43 v2(2011.16,2056.23) ; v2(3960.35,3632.4) 4019.48,3573.27 v2(4409.74,3573.27)
  Bottom Layer w10: v2(2011.16,2056.23) 2041.84,2086.91 U3.5@2065.33,2086.91 ; v2(3080.42,3732.44) 3188.98,3623.89 v2(3188.98,3623.1) ; v2(3816.13,3600.62) 3817.7,3602.19 3927.21,3602.19 3960.35,3635.33 v2(3960.35,3632.4)
HC4_VSENSE_ADC: R26.1 R27.2 U2.56 | length 4916.9
  Top Layer w10: R27.2@1960.18,2081.99 1960.18,2161.08 R26.1@1960.01,2161.25 2116.8,2161.25 v2(2119.23,2163.68) ; U2.56@4508.27,4012.77 4977.42,4012.77 5016.79,3973.4 v2(5016.79,3976.42)
  Signal Layer 1 w10: v2(2119.23,2163.68) 2119.23,2834.74 2850.01,3565.52 v2(2850.01,3589.7) ; v2(3572.2,3867.89) 3733.43,4029.12 4169.85,4029.12 4170.35,4028.62 4249.96,4028.62 v2(4271.27,4049.92) ; v2(4372.75,4049.92) 4943.28,4049.92 v2(5016.79,3976.42)
  Signal Layer 2 w10: v2(3187.34,3575.69) 3479.54,3867.89 v2(3572.2,3867.89) ; v2(4271.27,4049.92) v2(4372.75,4049.92)
  Bottom Layer w10: v2(2850.01,3589.7) 2850.01,3583.62 2870.96,3604.56 3158.47,3604.56 v2(3187.34,3575.69)
HC_1_OUTPUT: R35.2 T7.1 T7.2 T7.3 T8.1 T8.2 T8.3 X1.A7 X1.A8 | length 386
  Top Layer w10: 2957.94,2523.17 2957.94,2465.89 2939.36,2447.31 2939.36,2200.91 R35.2@2979.02,2161.25
HC_2_OUTPUT: R32.2 T5.1 T5.2 T5.3 T6.1 T6.2 T6.3 X1.A9 X1.A17 | length 373.7
  Top Layer w10: 2425.72,2497.57 2385.21,2457.05 2385.21,2211.1 R32.2@2435.07,2161.25
HC_3_OUTPUT: R29.2 T3.1 T3.2 T3.3 T4.1 T4.2 T4.3 X1.B2 X1.B3 | length 214.3
  Top Layer w10: 1181.96,2279.69 1300.4,2161.25 R29.2@1347.16,2161.25
HC_4_OUTPUT: R26.2 T1.1 T1.2 T1.3 T2.1 T2.2 T2.3 X1.B1 X1.B8 | length 400.8
  Top Layer w10: 1890.37,2524.9 1845.96,2480.49 1845.96,2206.4 R26.2@1891.11,2161.25
JTAG_RST: C23.2 C24.2 D6.1 P1.10 R24.1 R65.1 U2.63 W1.2 | length 6399.6
  Top Layer w10: C23.2@488.15,4466.71 510.4,4444.46 W1.2@613.16,4444.46 718.87,4444.46 R65.1@724.37,4449.97 746.02,4428.32 D6.1@842.48,4428.32 1224.55,4428.32 C24.2@1257.84,4461.61 v2(1340.54,4461.61) ; v2(1851.97,4041.5) 2012.96,4041.5 v2(2015.52,4038.94) ; v2(2049.14,4374.65) 2049.14,4576.85 2272.29,4800 3623.96,4800 3678.96,4745 4089.64,4745 v2(4117.01,4772.37) 4117.01,4691.38 R24.1@4119.7,4688.69 ; U2.63@4508.27,4150.56 4854.06,4150.56 4920.57,4217.07 4920.57,4399.93 4640.8,4679.7 v2(4600.72,4679.7) 4574.74,4705.68 P1.10@4533.98,4705.68
  Bottom Layer w10: v2(1340.54,4461.61) 1340.54,4282.76 1655.38,3967.93 1778.4,3967.93 v2(1851.97,4041.5) ; v2(2015.52,4038.94) 2049.14,4072.56 v2(2049.14,4374.65) ; v2@4121.86,4777.22 v2(4117.01,4772.37) 4211.21,4678.18 4599.2,4678.18 v2(4600.72,4679.7)
JTAG_TCLK: P1.4 U2.62 | length 1589.7
  Top Layer w10: P1.4@4383.98,4705.68 v2(4383.98,4815.97) ; U2.62@4508.27,4130.88 4880.73,4130.88 v2(4942.32,4192.47)
  Bottom Layer w10: v2(4383.98,4815.97) 4665.84,4815.97 4942.32,4539.49 v2(4942.32,4192.47)
JTAG_TDI: P1.8 U2.61 | length 1440.2
  Top Layer w10: P1.8@4483.98,4705.68 4483.98,4767 4516.98,4800 4548.78,4800 4975.91,4372.86 4975.91,4167.4 4919.71,4111.19 U2.61@4508.27,4111.19
JTAG_TDO: P1.6 U2.58 | length 1881.3
  Top Layer w10: P1.6@4433.98,4705.68 v2(4433.98,4850.92) ; U2.58@4508.27,4052.14 5004.75,4052.14 v2(5016.79,4040.1)
  Signal Layer 2 w10: v2(5006.36,4202.88) 5006.36,4188.63 5039.68,4155.31 5039.68,4133.35 5016.79,4110.47 v2(5016.79,4040.1)
  Bottom Layer w10: v2(4433.98,4850.92) 4688.65,4850.92 4958.82,4580.75 4958.82,4250.42 v2(5006.36,4202.88) v2@5007.91,4201.33
JTAG_TMS: P1.2 R23.1 U2.64 | length 1619.7
  Top Layer w10: R23.1@4243.71,4619.58 4243.71,4670.6 4278.79,4705.68 P1.2@4333.98,4705.68 v2(4333.98,4785.43) ; U2.64@4508.27,4170.25 4800.51,4170.25 v2(4882.67,4252.4)
  Bottom Layer w10: v2(4333.98,4785.43) 4665.71,4785.43 4908.15,4542.99 4908.15,4277.89 v2(4882.67,4252.4)
LC1_EN: IC8.3 U2.16 | length 879.8
  Top Layer w10: v2(3860.94,4219.14) 4041.33,4219.14 4071.18,4248.99 U2.16@4134.25,4248.99
  Bottom Layer w10: IC8.3@3413.2,3936.51 3413.2,3984.03 3649.37,4220.2 3860.94,4220.2 v2(3860.94,4219.14)
LC1_GATE: IC8.18 T16.4 | length 972.8
  Top Layer w10: v2(3536.7,2889.58) 3563.96,2862.31 T16.4@3563.96,2696.16
  Signal Layer 2 w10: v2(3360.11,3468.06) 3360.11,3364.6 3536.7,3188.01 v2(3536.7,2889.58)
  Bottom Layer w10: v2(3360.11,3468.06) 3413.2,3521.15 IC8.18@3413.2,3562.5
LC2_EN: IC8.5 U2.15 | length 1023.8
  Top Layer w10: v2(4102.91,4299.84) 4105.86,4299.84 4124.82,4318.8 4141.8,4318.8 4153.94,4306.67 U2.15@4153.94,4248.99
  Signal Layer 2 w10: v2(3815.29,4180.21) 3815.29,4237.45 3951.91,4374.07 4038.62,4374.07 4076.41,4336.28 4076.41,4322.28 4098.84,4299.84 v2(4102.91,4299.84)
  Bottom Layer w10: IC8.5@3513.2,3936.51 3539.88,3963.2 3539.88,4063.54 3656.55,4180.21 v2(3815.29,4180.21)
LC2_GATE: IC8.16 T15.4 | length 1811.2
  Top Layer w10: v2(3810.6,3242.8) 3834.96,3242.8 3916.21,3161.56 v2(4181.33,3161.56) ; v2(4632.68,2803.32) 4700.58,2735.42 T15.4@4700.58,2682.38
  Signal Layer 1 w10: v2(3572.2,3413.74) 3664.02,3413.74 3810.6,3267.17 v2(3810.6,3242.8)
  Signal Layer 2 w10: v2(4181.33,3161.56) 4181.33,2886.09 4264.1,2803.32 v2(4632.68,2803.32)
  Bottom Layer w10: IC8.16@3513.2,3562.5 3513.2,3472.75 v2(3572.2,3413.74)
LC3_EN: IC8.7 U2.14 | length 1079.8
  Top Layer w10: v2(4102.91,4345.7) 4152.48,4345.7 4173.62,4324.55 U2.14@4173.62,4248.99
  Signal Layer 2 w10: v2(3768.87,4115.68) 3768.87,4214.36 3979.31,4424.8 4037.39,4424.8 4102.91,4359.28 v2(4102.91,4345.7)
  Bottom Layer w10: IC8.7@3613.2,3936.51 3613.2,4113.52 3652.3,4152.63 3731.93,4152.63 v2(3768.87,4115.68)
LC3_GATE: IC8.14 T14.4 | length 1411.8
  Top Layer w10: v2(3612.51,3375.95) 3700.17,3375.95 3768.87,3444.65 v2(3847.03,3444.65) ; v2(3982.15,2986.09) 4012.62,2986.09 T14.4@4307.47,2691.24
  Signal Layer 2 w10: v2(3847.03,3444.65) 3982.15,3309.53 v2(3982.15,2986.09)
  Bottom Layer w10: v2(3612.51,3375.95) 3613.2,3376.64 IC8.14@3613.2,3562.5
LC4_EN: IC8.9 U2.13 | length 966.1
  Top Layer w10: v2(4113.06,4391.55) 4121.51,4400 4193.31,4328.2 U2.13@4193.31,4248.99
  Signal Layer 2 w10: v2(3720.82,4108.9) 3720.82,4189.64 3972.47,4441.3 4044.22,4441.3 4093.97,4391.55 v2(4113.06,4391.55)
  Bottom Layer w10: IC8.9@3713.2,3936.51 3713.2,4101.28 v2(3720.82,4108.9)
LC4_GATE: IC8.12 T13.4 | length 963.9
  Top Layer w10: v2(3764.56,2925.89) 3764.56,2914.04 3943.03,2735.57 T13.4@3943.03,2696.16
  Signal Layer 2 w10: v2(3712.2,3444.65) 3714.84,3444.65 3764.56,3394.93 v2(3764.56,2925.89)
  Bottom Layer w10: v2(3712.2,3444.65) 3712.2,3561.51 IC8.12@3713.2,3562.5
LC5_EN: IC7.3 U2.12 | length 2076.2
  Top Layer w10: v2(4076,4447) 4097.85,4447 4212.99,4331.85 U2.12@4212.99,4248.99
  Signal Layer 2 w10: v2(3930.71,3575.69) 3685.76,3820.64 3685.76,4177.93 3965.64,4457.8 4065.42,4457.8 4076.23,4447 v2(4076,4447)
  Bottom Layer w10: v2(3930.71,3575.69) 3979.23,3527.17 4362.14,3527.17 4435.93,3453.38 IC7.3@4435.93,3415.36
LC5_GATE: IC7.18 T12.4 | length 2631.5
  Top Layer w10: T12.4@4090.01,577.07 4098.73,577.07 v2(4174.04,652.38)
  Signal Layer 1 w10: v2(4174.04,652.38) 4153.94,672.49 4153.94,2231.76 4174.04,2251.87 4174.04,2333.68 4235.33,2394.97 v2(4233.82,2394.97) ; v2(4253.13,2511.01) 4276.74,2534.61 4276.74,2763.77 v2(4435.93,2922.96)
  Bottom Layer w10: v2(4233.82,2394.97) 4233.82,2491.07 4253.13,2510.39 v2(4253.13,2511.01) ; v2(4435.93,2922.96) IC7.18@4435.93,3041.34
LC6_EN: IC7.5 U2.11 | length 2301
  Top Layer w10: v2(4105,4474) 4106.74,4474 4232.68,4348.07 U2.11@4232.68,4248.99
  Signal Layer 2 w10: v2(4105,4474) 4104.7,4474.3 3958.81,4474.3 3669.26,4184.76 3669.26,3796.53 3939.2,3526.59 v2(4516,3526.59)
  Bottom Layer w10: v2(4516,3526.59) 4535.93,3506.66 IC7.5@4535.93,3415.36
LC6_GATE: IC7.16 T11.4 | length 3358.5
  Top Layer w10: v2(4813.9,2894.04) 4918.65,2998.79 v2(4918.65,3078.74) ; T11.4@4851.17,577.07 4921.26,647.16 v2(4921.26,663.68)
  Signal Layer 1 w10: v2(4918.65,3078.74) 5027.77,2969.62 5027.77,2319.35 4914.91,2206.49 4914.91,2103.09 4914.91,670.03 v2(4921.26,663.68)
  Signal Layer 2 w10: v2(4536.4,2837.34) 4542.73,2843.67 4763.52,2843.67 v2(4813.9,2894.04)
  Bottom Layer w10: IC7.16@4535.93,3041.34 4536.4,3040.87 v2(4536.4,2837.34)
LC7_EN: IC7.7 U2.2 | length 1268.9
  Top Layer w10: U2.2@4409.84,4248.99 4409.84,4288.79 4425.72,4304.67 4539.63,4304.67 v2(4573.28,4271.02)
  Signal Layer 1 w10: v2(4635.93,3547.63) v2(4635.93,3754.66)
  Bottom Layer w10: v2(4573.28,4271.02) 4573.28,4236.19 4429.52,4092.43 4429.52,3885.29 4494.58,3820.23 4570.36,3820.23 v2(4635.93,3754.66) ; IC7.7@4635.93,3415.36 v2(4635.93,3547.63)
LC7_GATE: IC7.14 T10.4 | length 2588.1
  Top Layer w10: T10.4@4470.59,577.07 4542.73,649.21 v2(4542.73,654)
  Signal Layer 1 w10: v2(4542.73,654) 4542.73,2304.58 4623.29,2385.13 v2(4623.29,2388.81)
  Bottom Layer w10: v2(4623.29,2388.81) 4623.29,2506.42 4648.31,2531.45 4648.31,2741.88 4702.74,2796.31 4702.74,2885.95 4635.93,2952.76 IC7.14@4635.93,3041.34
LC8_EN: IC7.9 U2.1 | length 1174.4
  Top Layer w10: U2.1@4429.53,4248.99 4508.16,4248.99 v2(4508.27,4248.88)
  Signal Layer 1 w10: v2(4572.83,3750.46) 4583.96,3739.34 v2(4583.96,3589.7)
  Bottom Layer w10: v2(4508.27,4248.88) 4409.52,4150.14 4409.52,3877 4536.06,3750.46 v2(4572.83,3750.46) ; v2(4583.96,3589.7) 4693.93,3589.7 4735.93,3547.7 IC7.9@4735.93,3415.36
LC8_GATE: IC7.12 T9.4 | length 3262.4
  Top Layer w10: T9.4@3709.44,577.07 3779.02,646.65 v2(3779.02,655.81)
  Signal Layer 1 w10: v2(3779.02,655.81) 3779.02,2300.17 v2(3872.74,2393.89) ; v2(3889.31,2516.29) 3910.73,2537.71 3910.73,2753.25 4032.58,2875.09 4061.64,2875.09 v2(4066.12,2870.62)
  Signal Layer 2 w10: v2(4437.25,2872.86) 4660.62,2872.86 v2(4735.93,2948.17)
  Bottom Layer w10: v2(3872.74,2393.89) 3872.74,2499.72 v2(3889.31,2516.29) ; v2(4066.12,2870.62) 4435.01,2870.62 v2(4437.25,2872.86) ; v2(4735.93,2948.17) IC7.12@4735.93,3041.34
LC_1_ISENSE_ADC: IC16.5 U2.49 | length 2600.6
  Top Layer w10: v2(3927.57,3223.95) 4189.46,3223.95 v2(4232.68,3267.17) ; U2.49@4508.27,3874.97 4525.16,3858.08 v2(4610.61,3858.08)
  Signal Layer 1 w10: v2(3743.9,2248.51) 3743.9,2349.76 3847.03,2452.89 3847.03,2702.54 3783.45,2766.13 3783.45,2827.62 3736.49,2874.59 3736.49,3092.92 3867.51,3223.95 v2(3927.57,3223.95) ; v2(4610.61,3858.08) 4633.92,3858.08 4685.93,3806.07 v2(4685.93,3516.24)
  Signal Layer 2 w10: v2(4232.68,3267.17) 4361.58,3396.06 4565.76,3396.06 v2(4685.93,3516.24)
  Bottom Layer w10: IC16.5@3697.03,2248.51 v2(3743.9,2248.51)
LC_1_OUTPUT: R59.2 T16.1 T16.2 T16.3 X1.A1 | length 3878.5
  Top Layer w10: T16.1@3713.96,2696.16 3714.92,2697.11 v2(3799.01,2697.11)
  Top Layer w47.24: v8(3477.48,3411.42) 3672.82,3216.07 3672.82,2770.63
  Bottom Layer w10: R59.2@3796.44,2567.62 3796.44,2694.55 v2(3799.01,2697.11)
  Bottom Layer w47.24: X1.A1@688.98,3690.01 1012.13,3366.86 3083.55,3366.86 3128.11,3411.42 v8(3477.48,3411.42)
LC_1_VSENSE_ADC: R59.1 R60.2 U2.25 | length 2069.8
  Top Layer w10: v2(4025.67,3480.83) 4025.67,3518.21 3711.73,3832.15 3711.73,3963.53 3760.97,4012.77 U2.25@4055.51,4012.77
  Signal Layer 2 w10: v2(3863.78,2732.15) 4025.67,2894.04 v2(4025.67,3480.83)
  Bottom Layer w10: R59.1@3796.44,2498.72 3823.42,2498.72 3863.78,2539.08 v2(3863.78,2732.15)
LC_2_ISENSE_ADC: IC15.5 U2.38 | length 1982.5
  Top Layer w10: U2.38@4232.68,3796.23 4232.68,3672.12 v2(4300.71,3604.09)
  Signal Layer 1 w10: v2(4300.71,3604.09) 4975.2,2929.6 4975.2,2322.14 v2(4879.51,2226.46)
  Bottom Layer w10: IC15.5@4813.96,2226.46 v2(4879.51,2226.46)
LC_2_OUTPUT: R56.2 T15.1 T15.2 T15.3 X1.A2 | length 4653.5
  Top Layer w10: T15.1@4850.58,2682.38 4923.81,2682.38 v2(4933.65,2672.54)
  Top Layer w47.24: v5(3858.8,3316.93) 4260.78,3316.93 4807.07,2770.63
  Bottom Layer w10: R56.2@4933.65,2559.35 v2(4933.65,2672.54)
  Bottom Layer w47.24: X1.A2@688.98,3571.9 947.77,3313.11 3854.98,3313.11 v5(3858.8,3316.93)
LC_2_VSENSE_ADC: R56.1 R57.2 U2.21 | length 2653.3
  Top Layer w10: U2.21@4055.51,4091.51 4144.94,4091.51 v2(4181.33,4055.12) ; v2(4505.22,3574.96) 4569.74,3639.49 4711.38,3639.49 v2(4870.04,3480.83)
  Signal Layer 1 w10: v2(4181.33,4055.12) v2(4181.33,4170.25) ; v2(4470.98,3755.63) 4505.22,3721.4 v2(4505.22,3574.96)
  Signal Layer 2 w10: v2(4181.33,4170.25) 4312.59,4170.25 4425.72,4057.11 4425.72,3800.89 v2(4470.98,3755.63)
  Bottom Layer w10: v2(4870.04,3480.83) 4870.04,2923.16 5002.93,2790.27 5002.93,2559.73 R56.1@4937.79,2494.59 ; R57.2@4933.65,2433.37 R56.1@4933.65,2498.72
LC_3_ISENSE_ADC: IC14.5 U2.37 | length 1843.8
  Top Layer w10: v2(4212.6,3604.09) 4212.6,3795.84 U2.37@4212.99,3796.23
  Signal Layer 1 w10: v2(4212.6,3604.09) 4591.53,3225.16 4591.53,2456.39 4470.98,2335.84 v2(4470.98,2221)
  Bottom Layer w10: IC14.5@4420.85,2248.51 4448.36,2221 v2(4470.98,2221)
LC_3_OUTPUT: R53.2 T14.1 T14.2 T14.3 X1.A3 | length 4235.3
  Top Layer w10: T14.1@4457.47,2691.24 4549.79,2691.24 v2(4560.62,2680.41)
  Top Layer w47.24: v5(3858.8,3110.24) 4081.25,3110.24 4420.85,2770.63
  Bottom Layer w10: R53.2@4560.62,2567.62 v2(4560.62,2680.41)
  Bottom Layer w47.24: X1.A3@688.98,3453.79 914.42,3228.35 3622.92,3228.35 3741.03,3110.24 v5(3858.8,3110.24)